# EAGLE board OSO-BOOK-C2-02 (EAGLE 9.6.2)
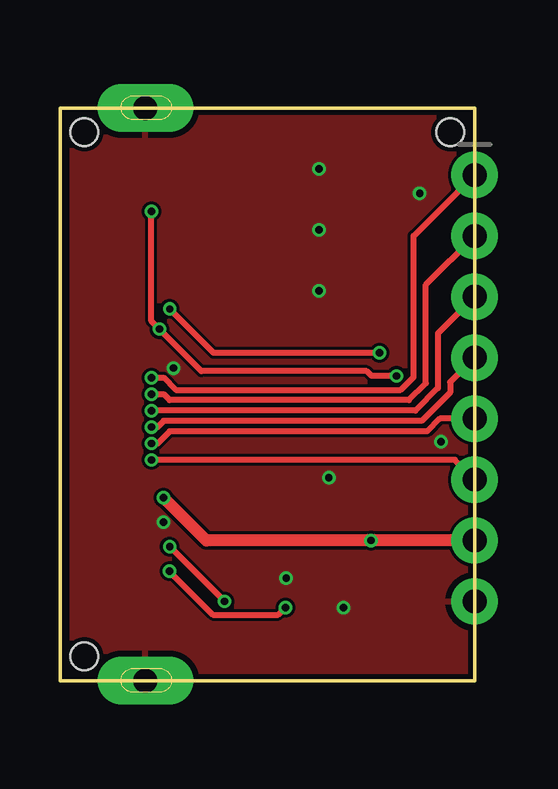
[diagram p0: board, top side]
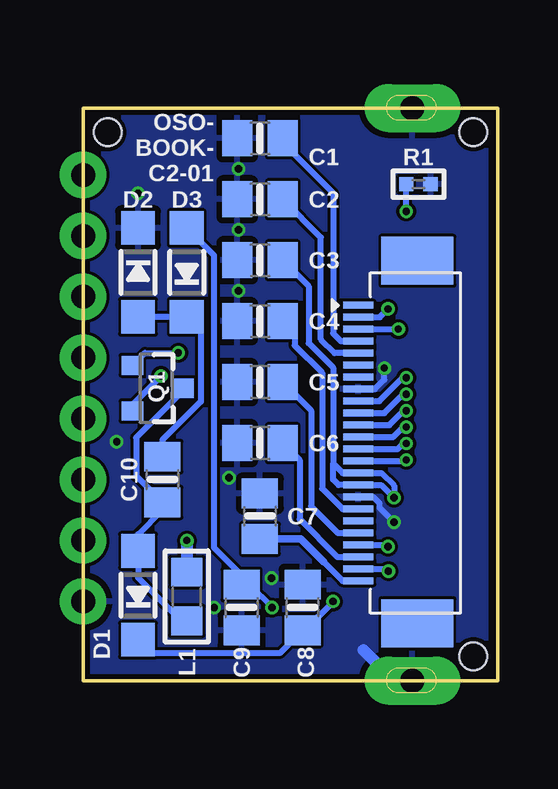
[diagram p1: board, bottom side, seen from below]

Size 17.27 x 23.88 mm. Coordinates in mm from the lower left corner, seen from the top.
Outline: 0,23.88 17.27,23.88 17.27,0 0,0 0,23.88
Copper layers (1*16): Top 0.035559375mm / dielectric 1.6mm / Bottom 0.035559375mm
Design rules "jlcpcb2layer": minimum track width 5mil, minimum drill 12mil, track to track 5mil, track to pad 5mil, pad to pad 5mil, via to via 5mil, smd to smd 5mil, copper to edge 8mil, drill to drill 6mil, minimum pad ring 5mil, minimum via ring 5mil, stop-mask expansion 2.5mil, vias tented up to drill 12mil, thermal gap 10mil
Net classes: 0 default: width 0.254 mm, drill 0.305 mm; 1 power: width 0.254 mm, drill 0.305 mm; 2 gnd: width 0.254 mm, drill 0.305 mm
Holes 1.15 mm at 1.02,1.02 1.02,22.86 16.26,22.86

## Footprints (pad centres in the part's own frame; a part is rotated, then mirrored left to right if it is on the bottom)
0805-NO = smd 1.24 x 1.5: 1 -0.95,0; 2 0.95,0
SOD-123 = smd 1.4 x 1.4: A 1.85,0; C -1.85,0
EINK_24PIN = smd 0.275 x 1.25: 1 -5.75,-2.25; 2 -5.25,-2.25; 3 -4.75,-2.25; 4 -4.25,-2.25; 5 -3.75,-2.25; 6 -3.25,-2.25; 7 -2.75,-2.25; 8 -2.25,-2.25; 9 -1.75,-2.25; 10 -1.25,-2.25; 11 -0.75,-2.25; 12 -0.25,-2.25; 13 0.25,-2.25; 14 0.75,-2.25; 15 1.25,-2.25; 16 1.75,-2.25; 17 2.25,-2.25; 18 2.75,-2.25; 19 3.25,-2.25; 20 3.75,-2.25; 21 4.25,-2.25; 22 4.75,-2.25; 23 5.25,-2.25; 24 5.75,-2.25 | smd 2 x 3: SPRT1 -7.6,0.21; SPRT2 7.51,0.21
1X08_ROUND_76 = drill 1 pad 1.93: 1 -8.89,0; 2 -6.35,0; 3 -3.81,0; 4 -1.27,0; 5 1.27,0; 6 3.81,0; 7 6.35,0; 8 8.89,0
MICROBUILDER__0805 = smd 1.2 x 1.3: 1 -1.016,0; 2 1.016,0
SOT23-3 = smd 0.8 x 0.9: 1 -0.95,-1; 2 0.95,-1; 3 0,1.1
_0402 = smd 0.6 x 0.6: 1 -0.508,0; 2 0.508,0
BIGOVAL = drill 1 pad 2 long: MP 0,0

## Placement (x,y rotation side)
C1  1uF  [0805-NO]  9.91,22.61 0 bottom
C2  1uF  [0805-NO]  9.91,20.07 0 bottom
C3  1uF  [0805-NO]  9.91,17.53 0 bottom
C4  1uF  [0805-NO]  9.91,14.99 0 bottom
C5  1uF  [0805-NO]  9.91,12.45 0 bottom
C6  1uF  [0805-NO]  9.91,9.91 0 bottom
C7  1uF  [0805-NO]  9.91,6.86 270 bottom
C8  1uF  [0805-NO]  8.13,3.05 90 bottom
C9  1uF  [0805-NO]  10.67,3.05 270 bottom
C10  4.7uF  [0805-NO]  13.97,8.38 90 bottom
D1  MBR0530  [SOD-123]  14.99,3.56 90 bottom
D2  MBR0530  [SOD-123]  14.99,17.02 270 bottom
D3  MBR0530  [SOD-123]  12.95,17.02 90 bottom
J1  EINK_24PIN_CONNECTOR  [EINK_24PIN]  3.56,9.91 270 bottom
JP1  [1X08_ROUND_76]  17.27,12.19 270 top
L1  10uH  [MICROBUILDER__0805]  12.95,3.51 270 bottom
Q1  IRLML0100  [SOT23-3]  14.22,12.19 270 bottom
R1  0.47ohm  [_0402]  3.3,20.7 0 bottom
U$2  BIGOVAL  [BIGOVAL]  3.56,0 90 top
U$3  BIGOVAL  [BIGOVAL]  3.56,23.88 90 top

## Library data of the parts
C1-C10 D1-D3 J1 R1 = microbuilder
JP1 U$2 U$3 = OSO-BOOK-C2-01
L1 = Adafruit 3.5in 480x320 FeatherWing
Q1 = Parts

## Nets
3.3V [power]: C3.2 J1.15 J1.16 JP1.7 L1.1
EINK_BUSY: J1.9 JP1.1
EINK_CS: J1.12 JP1.4
EINK_DC: J1.11 JP1.3
EINK_RST: J1.10 JP1.2
GDR: J1.2 Q1.1
GND [gnd]: C1.1 C2.1 C3.1 C4.1 C5.1 C6.1 C7.1 C8.2 C9.2 D2.C J1.8 J1.17 JP1.8 R1.2 U$2.MP U$3.MP
MOSI: J1.14 JP1.6
N$2: C10.2 D2.A D3.C
N$3: C10.1 D1.A L1.2 Q1.3
PREVGH: C8.1 D1.C J1.21
PREVGL: C9.1 D3.A J1.23
RESE: J1.3 Q1.2 R1.1
SCK: J1.13 JP1.5
VCOM: C7.2 J1.24
VDD: C4.2 J1.18
VGH: C2.2 J1.5
VGL: C1.2 J1.4
VSH: C5.2 J1.20
VSL: C6.2 J1.22

## Tracks (layer width: path | path; a pad name or v marks a point on that pad's centre or on a via)
3.3V  (via drill 0.3)
  Top 0.508: v4.32,7.62 6.1,5.84 v12.95,5.84 JP1.7
  Bottom 0.254: C3.2 7.87,16.44 7.87,14.07 6.86,13.06 6.86,9.05 | 6.86,9.05 6.46,8.66 J1.15 4.85,8.66 4.32,8.13 v4.32,7.62 4.85,8.16 J1.16 6.63,8.16 6.86,8.38 6.86,9.05
  Bottom 0.508: v12.95,5.84 L1.1
EINK_BUSY  (via drill 0.3)
  Top 0.254: v3.81,12.63 4.32,12.63 4.83,12.12 14.2,12.12 14.73,12.66 14.73,18.54 JP1.1
  Bottom 0.254: J1.9 4.93,11.66 3.95,12.63 v3.81,12.63
EINK_CS  (via drill 0.3)
  Top 0.254: v3.81,10.57 4.06,10.57 4.32,10.82 15.07,10.82 16.26,12.01 16.26,12.45 JP1.4
  Bottom 0.254: v3.81,10.57 3.94,10.57 4.35,10.16 J1.12
EINK_DC  (via drill 0.3)
  Top 0.254: v3.81,11.26 14.81,11.26 15.75,12.19 15.75,14.48 JP1.3
  Bottom 0.254: J1.11 4.51,10.66 3.91,11.26 v3.81,11.26
EINK_RST  (via drill 0.3)
  Top 0.254: v3.81,11.94 4.32,11.94 4.57,11.69 14.54,11.69 15.24,12.39 15.24,16.51 JP1.2
  Bottom 0.254: J1.10 4.72,11.16 3.93,11.94 v3.81,11.94
GDR  (via drill 0.3)
  Top 0.254: v13.31,13.67 6.4,13.67 v4.57,15.49
  Bottom 0.254: J1.2 4.91,15.16 v4.57,15.49 | Q1.1 14.7,13.67 v13.31,13.67
GND  (via drill 0.3)
  Bottom 0.254: J1.8 5.12,12.16 4.72,12.55 v4.72,13.03 | v4.32,6.6 4.93,7.21 4.93,7.4 5.18,7.66 J1.17
  Bottom 0.305: U$2.MP 4.32,0
  Bottom 0.508: 4.32,0 5.59,1.27
  other vias: 11.2,8.46 10.79,16.26 10.79,18.8 10.79,21.34 14.99,20.32 11.81,3.05 9.42,4.27 15.88,9.96
  pour Top: 17.27,23.88 0.51,23.88 0.51,0 17.27,0
  pour Bottom: 0.51,23.88 17.27,23.88 17.27,0 0.51,0
MOSI  (via drill 0.3)
  Top 0.254: JP1.6 16.45,9.2 v3.81,9.2
  Bottom 0.254: v3.81,9.2 3.85,9.16 J1.14
N$2
  Bottom 0.254: D2.A D3.C 12.37,14.58 12.37,11.63 13.97,10.03 C10.2
N$3
  Bottom 0.254: Q1.3 13.12,12.06 15.06,10.13 15.06,8.52 C10.1 13.97,7.11 14.99,6.1 D1.A 14.99,4.29 13.18,2.49 L1.2
PREVGH  (via drill 0.3)
  Top 0.254: v4.57,5.59 v6.86,3.3
  Bottom 0.254: J1.21 4.64,5.66 v4.57,5.59 | v6.86,3.3 v6.86,3.29 8.05,2.1 C8.1 9.08,1.14 14.42,1.14 D1.C
PREVGL  (via drill 0.3)
  Top 0.254: v4.56,4.56 6.37,2.74 9.09,2.74 v9.4,3.05
  Bottom 0.254: J1.23 4.66,4.66 v4.56,4.56 | v9.4,3.05 10.35,4 C9.1 10.67,4.39 11.81,5.54 11.81,17.73 D3.A
RESE  (via drill 0.3)
  Top 0.254: v14.02,12.7 12.98,12.7 12.78,12.9 5.89,12.9 v4.14,14.66 3.81,14.99 v3.81,19.56
  Bottom 0.254: J1.3 v4.14,14.66 | Q1.2 15.22,11.5 v14.02,12.7 | v3.81,19.56 R1.1
SCK  (via drill 0.3)
  Top 0.254: v3.81,9.88 4.06,9.88 4.57,10.39 15.3,10.39 15.82,10.92 JP1.5
  Bottom 0.254: J1.13 4.17,9.66 3.94,9.88 v3.81,9.88
VCOM
  Bottom 0.254: J1.24 6.46,4.16 7.25,4.94
  Bottom 0.305: C7.2 8.22,5.91 7.25,4.94
VDD
  Bottom 0.254: C4.2 8.46,14.49 8.46,13.98 7.31,12.84 7.31,8.01 6.46,7.16 J1.18
VGH
  Bottom 0.254: J1.5 6.8,13.66 7.37,14.22 7.37,18.48 C2.2
VGL
  Bottom 0.254: C1.2 8.96,22.42 6.86,20.32 6.86,14.48 6.54,14.16 J1.4
VSH
  Bottom 0.254: C5.2 7.77,11.26 7.77,7.26 6.66,6.16 J1.20
VSL
  Bottom 0.254: J1.22 6.68,5.16 8.26,6.73 8.26,9.21 C6.2

## Text on the board
bPlace: OSO- / BOOK- / C2-01